# Altium PCB ThrusterBoard.PcbDoc (part 2 of 2)
Units mil, origin at the board's own origin, x right, y up, seen from the top; angles counter-clockwise.
Board outline 6500 x 2830 mil, 2 copper layers (Top Layer, Bottom Layer); 72 components, 86 nets, 351 pads, 101 vias.
Unrouted connection lines stored in the file: 1.
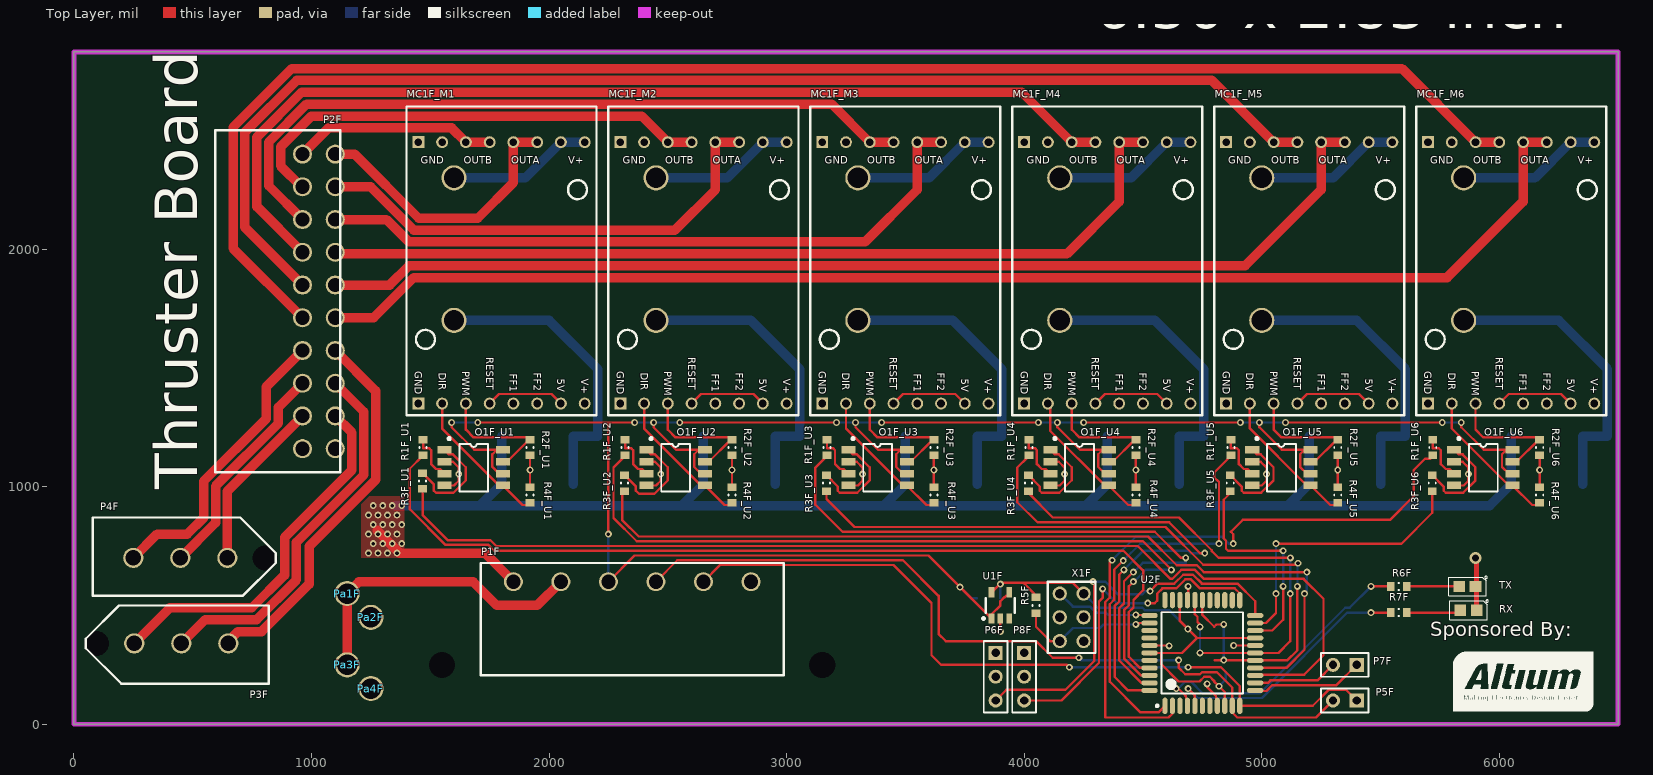
[diagram p0: Top Layer view]

## Via types
v1: diameter 29, hole 15, Top Layer to Bottom Layer, 100 vias
v2: diameter 50, hole 28, Top Layer to Bottom Layer, 1 vias

## Nets (pads, with @x,y where several pads share a name; then routed paths per layer and width w, separated by ;. In a path a pad name is that pad's centre, name@x,y a point inside that pad or via, vN(x,y) a via of type N, cw(c..) or ccw(c..) an arc to the next point about the centre after c; other vN are vias at no path point) (continued)
pads on no net: H1F.0 MC1F_M1.FF1 MC1F_M1.FF2 MC1F_M1.V+_SENSE MC1F_M2.FF1 MC1F_M2.FF2 MC1F_M2.V+_SENSE MC1F_M3.FF1 MC1F_M3.FF2 MC1F_M3.V+_SENSE MC1F_M4.FF1 MC1F_M4.FF2 MC1F_M4.V+_SENSE MC1F_M5.FF1 MC1F_M5.FF2 MC1F_M5.V+_SENSE MC1F_M6.FF1 MC1F_M6.FF2 MC1F_M6.V+_SENSE P2F.19 P2F.20 P3F.0 P4F.0 P6F.2 P8F.2 U1F.NC U2F.3 U2F.6 U2F.7 U2F.24 U2F.32 U2F.33 U2F.36 U2F.37 U2F.40 X1F.3 X1F.4

## Polygon pours and split planes (outlines as drawn)
GND on Bottom Layer "Ground Plane" (solid, pour order 4): 0,2830 0,0 6500,0 6500,2830
24V on Bottom Layer "24V Power Plane, Bottom" (solid, pour order 2): 1210,960 1210,700 1360,700 1390,700 1390,960
24V on Top Layer "24V Power Plane, Top" (solid, pour order 0): 1210,960 1210,700 1360,700 1390,700 1390,960

## Keep-outs
Keep-Out Layer:
  the board outline again, w20

## Silkscreen, mask and mechanical layers (free items; w line width, h text height)
Top Overlay:
  drawing of 1840 lines, arcs and shapes, not listed
  text "6.50 x 2.83 inch" at 4300,2930 h180
  text "Thruster Board" at 520,990 h180 r90
  text "Sponsored By:" at 5710,370 h60
Bottom Overlay:
  text "24V IN" at 1875,500 h60 r90
  text "12V IN" at 2075,500 h60 r90
  text "5V IN" at 2275,500 h60 r90
  text "SDA" at 2475,500 h60 r90
  text "SCL" at 2675,500 h60 r90
  text "GND" at 2875,500 h60 r90

## Text inside footprints (layer, text, board x,y; h text height)
MC1F_M1: Top Overlay "GND" at 1460,2360 h30; Top Overlay "OUTB" at 1640,2360 h30; Top Overlay "OUTA" at 1840,2360 h30; Top Overlay "V+" at 2080,2360 h30; Top Overlay "V+" at 2135,1455 h30 r270; Top Overlay "5V" at 2035,1455 h30 r270; Top Overlay "FF2" at 1935,1480 h30 r270; Top Overlay "FF1" at 1835,1475 h30 r270; Top Overlay "RESET" at 1735,1545 h30 r270; Top Overlay "PWM" at 1635,1485 h30 r270; Top Overlay "DIR" at 1535,1480 h30 r270; Top Overlay "GND" at 1435,1485 h30 r270
MC1F_M2: Top Overlay "GND" at 2310,2360 h30; Top Overlay "OUTB" at 2490,2360 h30; Top Overlay "OUTA" at 2690,2360 h30; Top Overlay "V+" at 2930,2360 h30; Top Overlay "V+" at 2985,1455 h30 r270; Top Overlay "5V" at 2885,1455 h30 r270; Top Overlay "FF2" at 2785,1480 h30 r270; Top Overlay "FF1" at 2685,1475 h30 r270; Top Overlay "RESET" at 2585,1545 h30 r270; Top Overlay "PWM" at 2485,1485 h30 r270; Top Overlay "DIR" at 2385,1480 h30 r270; Top Overlay "GND" at 2285,1485 h30 r270
MC1F_M3: Top Overlay "GND" at 3160,2360 h30; Top Overlay "OUTB" at 3340,2360 h30; Top Overlay "OUTA" at 3540,2360 h30; Top Overlay "V+" at 3780,2360 h30; Top Overlay "V+" at 3835,1455 h30 r270; Top Overlay "5V" at 3735,1455 h30 r270; Top Overlay "FF2" at 3635,1480 h30 r270; Top Overlay "FF1" at 3535,1475 h30 r270; Top Overlay "RESET" at 3435,1545 h30 r270; Top Overlay "PWM" at 3335,1485 h30 r270; Top Overlay "DIR" at 3235,1480 h30 r270; Top Overlay "GND" at 3135,1485 h30 r270
MC1F_M4: Top Overlay "GND" at 4010,2360 h30; Top Overlay "OUTB" at 4190,2360 h30; Top Overlay "OUTA" at 4390,2360 h30; Top Overlay "V+" at 4630,2360 h30; Top Overlay "V+" at 4685,1455 h30 r270; Top Overlay "5V" at 4585,1455 h30 r270; Top Overlay "FF2" at 4485,1480 h30 r270; Top Overlay "FF1" at 4385,1475 h30 r270; Top Overlay "RESET" at 4285,1545 h30 r270; Top Overlay "PWM" at 4185,1485 h30 r270; Top Overlay "DIR" at 4085,1480 h30 r270; Top Overlay "GND" at 3985,1485 h30 r270
MC1F_M5: Top Overlay "GND" at 4860,2360 h30; Top Overlay "OUTB" at 5040,2360 h30; Top Overlay "OUTA" at 5240,2360 h30; Top Overlay "V+" at 5480,2360 h30; Top Overlay "V+" at 5535,1455 h30 r270; Top Overlay "5V" at 5435,1455 h30 r270; Top Overlay "FF2" at 5335,1480 h30 r270; Top Overlay "FF1" at 5235,1475 h30 r270; Top Overlay "RESET" at 5135,1545 h30 r270; Top Overlay "PWM" at 5035,1485 h30 r270; Top Overlay "DIR" at 4935,1480 h30 r270; Top Overlay "GND" at 4835,1485 h30 r270
MC1F_M6: Top Overlay "GND" at 5710,2360 h30; Top Overlay "OUTB" at 5890,2360 h30; Top Overlay "OUTA" at 6090,2360 h30; Top Overlay "V+" at 6330,2360 h30; Top Overlay "V+" at 6385,1455 h30 r270; Top Overlay "5V" at 6285,1455 h30 r270; Top Overlay "FF2" at 6185,1480 h30 r270; Top Overlay "FF1" at 6085,1475 h30 r270; Top Overlay "RESET" at 5985,1545 h30 r270; Top Overlay "PWM" at 5885,1485 h30 r270; Top Overlay "DIR" at 5785,1480 h30 r270; Top Overlay "GND" at 5685,1485 h30 r270